# EAGLE board gorrazoptere_v0_93 (EAGLE 4.16)
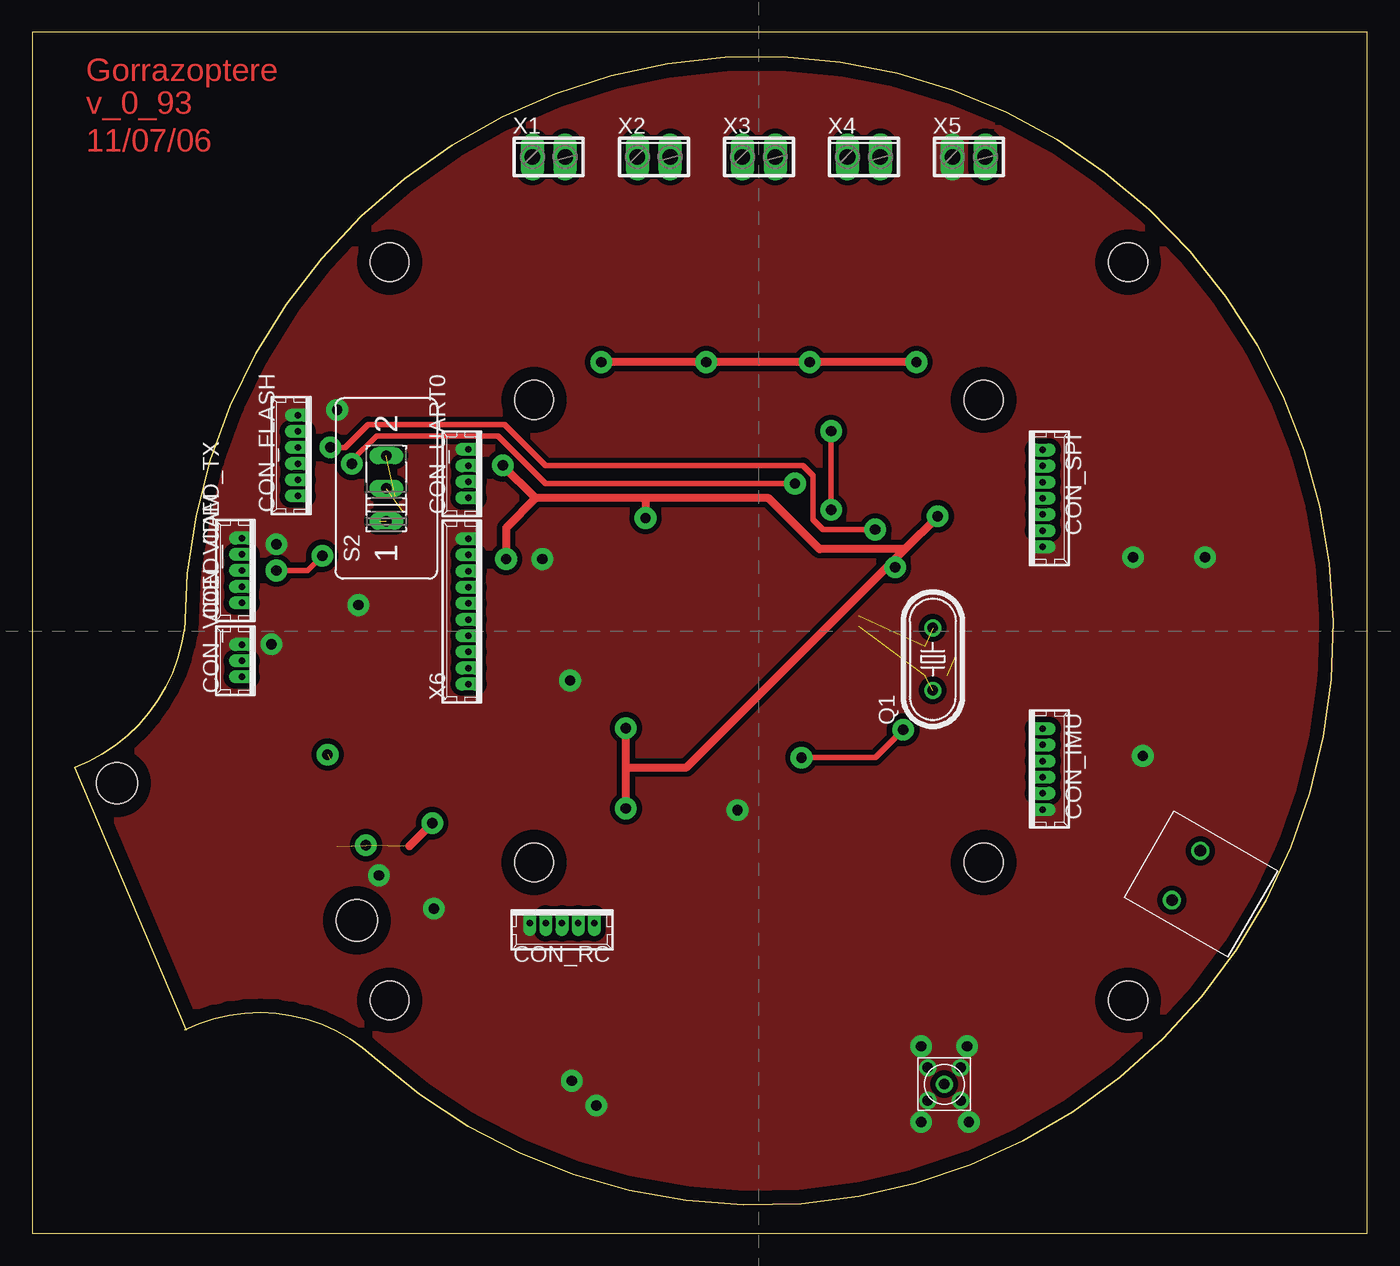
[diagram p0: board, top side]
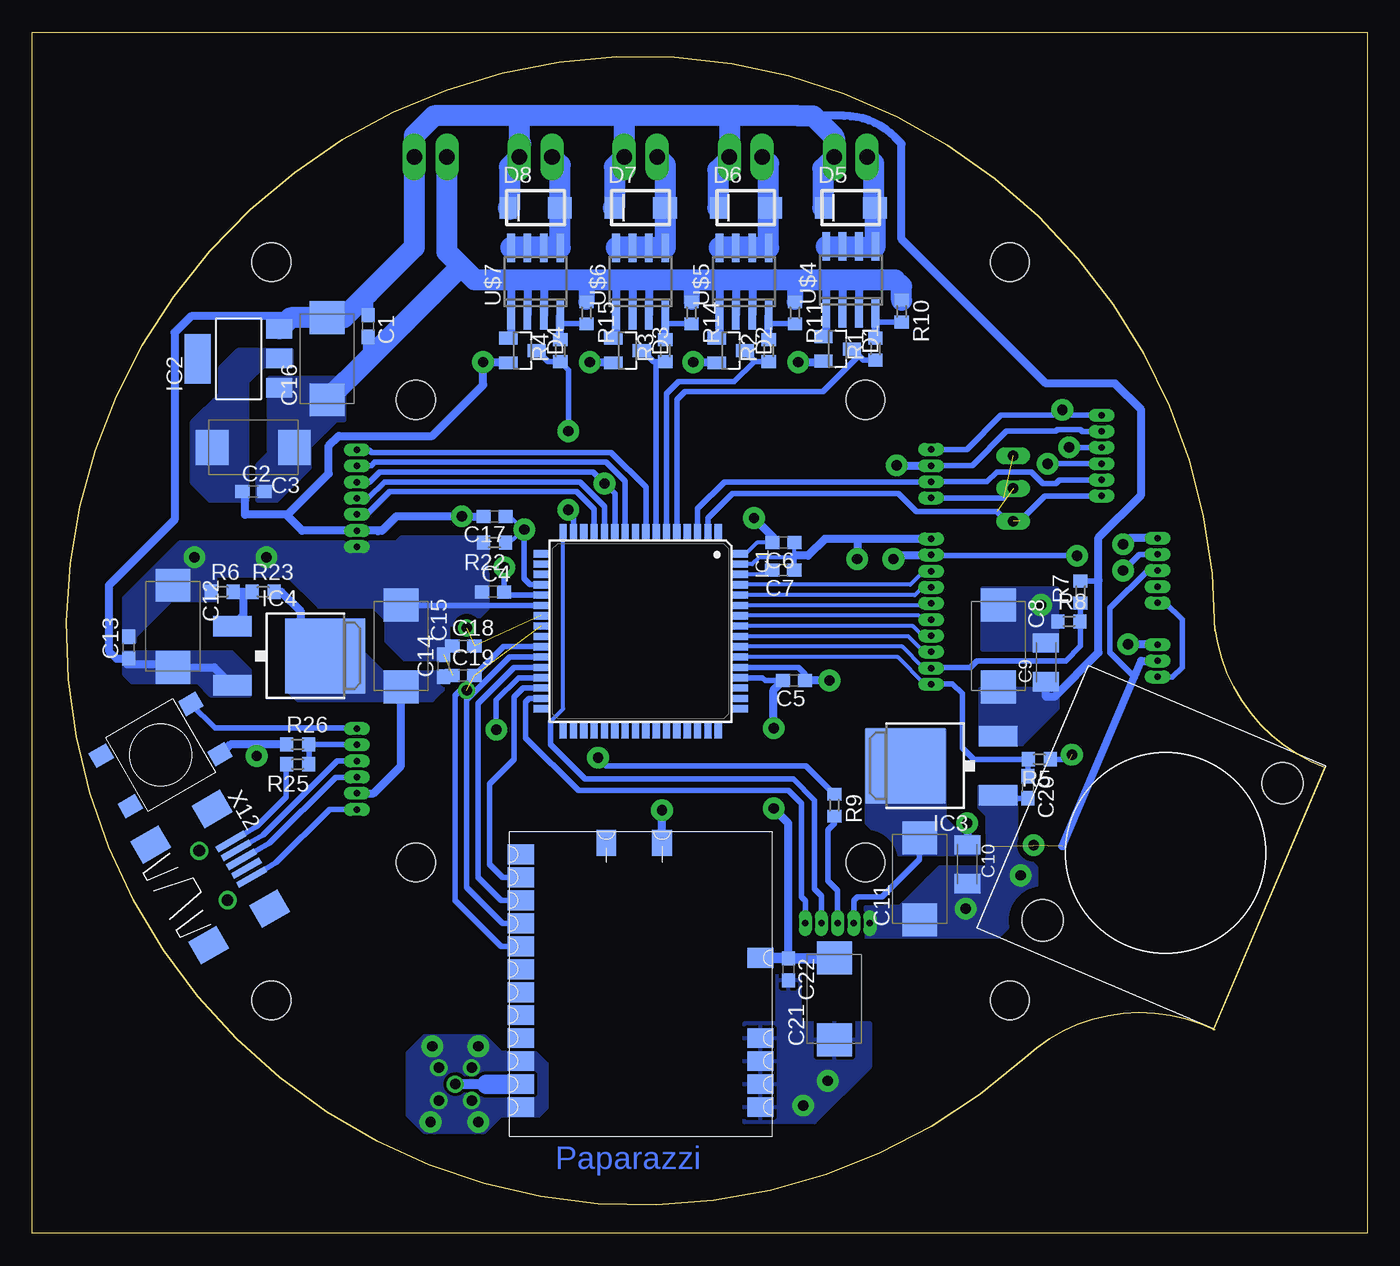
[diagram p1: board, bottom side, seen from below]

Size 103.3 x 92.95 mm. Coordinates in mm from the lower left corner, seen from the top.
Outline: 11.77,15.74 arc-69 26.51,13.58 arc312 11.77,46.6
Outline: 11.77,46.86 arc-62 3.26,36.06 11.9,15.74
Outline: 0,0 103.3,0 103.3,92.95 0,92.95 0,0
Copper layers (1*16): Top 0.035mm / dielectric 1.5mm / Bottom 0.035mm
Design rules "default": minimum track width 10mil, minimum drill 24mil, track to track 8mil, track to pad 8mil, pad to pad 8mil, via to via 8mil, smd to smd 8mil, copper to edge 40mil, drill to drill 8mil, minimum pad ring 10mil, minimum via ring 8mil, stop-mask expansion 4mil, vias tented up to drill 0mil, thermal gap 10mil
Holes 3 mm at 27.65,75.18 84.8,75.18 84.8,18.03 27.65,18.03 38.82,64.51 73.62,64.51 73.62,28.7 38.82,28.7

## Footprints (pad centres in the part's own frame; a part is rotated, then mirrored left to right if it is on the bottom)
C0603 = smd 1.1 x 1: 1 -0.85,0; 2 0.85,0
D/7343-31R = smd 2.55 x 2.7: + 3.175,0; - -3.175,0
C1206K = smd 1.5 x 2: 1 -1.5,0; 2 1.5,0
53047-06 = drill 0.5 pad 0.698 long: 1 3.125,0; 2 1.875,0; 3 0.625,0; 4 -0.625,0; 5 -1.875,0; 6 -3.125,0
53047-05 = drill 0.5 pad 0.698 long: 1 2.5,0; 2 1.25,0; 3 0,0; 4 -1.25,0; 5 -2.5,0
53047-07 = drill 0.5 pad 0.698 long: 1 3.75,0; 2 2.5,0; 3 1.25,0; 4 0,0; 5 -1.25,0; 6 -2.5,0; 7 -3.75,0
53047-04 = drill 0.5 pad 0.698 long: 1 1.875,0; 2 0.625,0; 3 -0.625,0; 4 -1.875,0
53047-03 = drill 0.5 pad 0.698 long: 1 1.25,0; 2 0,0; 3 -1.25,0
SOT23 = smd 1 x 1.4: 1 -0.95,-1.1; 2 0.95,-1.1; 3 0,1.1
DO-214BA = smd 1.85 x 1.68: A 1.87,0 | smd 1.32 x 1.68: C -2.12,0
TQFP64-AEB = smd 1.194 x 0.559: 1 -7.7,6; 2 -7.7,5.2; 3 -7.7,4.4; 4 -7.7,3.6; 5 -7.7,2.8; 6 -7.7,2; 7 -7.7,1.2; 8 -7.7,0.4; 9 -7.7,-0.4; 10 -7.7,-1.2; 11 -7.7,-2; 12 -7.7,-2.8; 13 -7.7,-3.6; 14 -7.7,-4.4; 15 -7.7,-5.2; 16 -7.7,-6; 33 7.7,-6; 34 7.7,-5.2; 35 7.7,-4.4; 36 7.7,-3.6; 37 7.7,-2.8; 38 7.7,-2; 39 7.7,-1.2; 40 7.7,-0.4; 41 7.7,0.4; 42 7.7,1.2; 43 7.7,2; 44 7.7,2.8; 45 7.7,3.6; 46 7.7,4.4; 47 7.7,5.2; 48 7.7,6 | smd 0.559 x 1.194: 17 -6,-7.7; 18 -5.2,-7.7; 19 -4.4,-7.7; 20 -3.6,-7.7; 21 -2.8,-7.7; 22 -2,-7.7; 23 -1.2,-7.7; 24 -0.4,-7.7; 25 0.4,-7.7; 26 1.2,-7.7; 27 2,-7.7; 28 2.8,-7.7; 29 3.6,-7.7; 30 4.4,-7.7; 31 5.2,-7.7; 32 6,-7.7; 49 6,7.7; 50 5.2,7.7; 51 4.4,7.7; 52 3.6,7.7; 53 2.8,7.7; 54 2,7.7; 55 1.2,7.7; 56 0.4,7.7; 57 -0.4,7.7; 58 -1.2,7.7; 59 -2,7.7; 60 -2.8,7.7; 61 -3.6,7.7; 62 -4.4,7.7; 63 -5.2,7.7; 64 -6,7.7
SOT223 = smd 1.499 x 2.007: 1 -2.261,-3.15; 2 0.025,-3.15; 3 2.311,-3.15 | smd 3.81 x 2.007: 4 0,3.15
DPACK = smd 1.6 x 3: 1 -2.28,-4.8; 3 2.28,-4.8 | smd 5.8 x 6.2: 4 0,2.38
HC49U-V = drill 0.813 round: 1 -2.413,0; 2 2.413,0
R0603 = smd 1 x 1.1: 1 -0.85,0; 2 0.85,0
M251 = drill 0.813 long: 1 -2.54,0; 2 0,0; 3 2.54,0
B3S = smd 1.55 x 1.3: P$1 4,-2.25; P$2 -4,-2.25; P$3 4,2.25; P$4 -4,2.25
MAXSONAR_ANA.PAC = drill 0.8 pad 1.676 round: P$3 18.415,6.858; P$6 18.415,14.478; P$7 18.415,17.018 | hole 3.2: 2.54,2.54; 15.494,19.558
WI_232_DTS = smd 2.032 x 1.524: P$1 -10.668,1.651; P$2 -10.668,-2.667 | smd 1.524 x 2.032: P$3 -9.779,-9.271; P$4 -8.001,-9.271; P$5 -6.223,-9.271; P$6 -4.445,-9.271; P$7 -2.667,-9.271; P$8 -0.889,-9.271; P$9 0.889,-9.271; P$10 2.667,-9.271; P$11 4.445,-9.271; P$12 6.223,-9.271; P$13 8.001,-9.271; P$14 9.779,-9.271; P$15 9.779,9.271; P$16 8.001,9.271; P$17 6.223,9.271; P$18 4.445,9.271; P$19 -1.778,9.271
SO08 = smd 0.6 x 2.2: 1 -1.905,-2.6; 2 -0.635,-2.6; 3 0.635,-2.6; 4 1.905,-2.6; 5 1.905,2.6; 6 0.635,2.6; 7 -0.635,2.6; 8 -1.905,2.6
CON_MMCX = drill 0.813 round: P$1 1.27,1.27; P$2 -1.27,1.27; P$3 -1.27,-1.27; P$4 1.27,-1.27; P$5 0,0
2POL254 = drill 1.2 long: 1 -1.27,0; 2 1.27,0
53047-10 = drill 0.5 pad 0.698 long: 1 5.625,0; 2 4.375,0; 3 3.125,0; 4 1.875,0; 5 0.625,0; 6 -0.625,0; 7 -1.875,0; 8 -3.125,0; 9 -4.375,0; 10 -5.625,0
USB-MB-S = smd 2.5 x 0.5: D+ 2.5,0; D- 2.5,0.8; GND 2.5,-1.6; ID 2.5,-0.8; VBUS 2.5,1.6 | smd 2.5 x 2: P$1 -3,-4.5; P$2 -3,4.5; P$3 2.5,-4.4; P$4 2.5,4.5 | drill 0.9 round: P$5 0,2.2; P$6 0,-2.2

## Placement (x,y rotation side)
C1  100nF  [C0603]  77.31,70.23 270 bottom
C2  100nF  [C0603]  86.2,57.4 0 bottom
C3  22uF  [D/7343-31R]  86.2,60.83 180 bottom
C4  [C0603]  67.65,49.65 0 bottom
C5  [C0603]  44.36,42.79 180 bottom
C6  [C0603]  45.17,53.46 180 bottom
C7  100nF  [C0603]  45.19,51.34 180 bottom
C8  22uF  [D/7343-31R]  28.54,45.46 270 bottom
C9  100nF  [C1206K]  24.85,44.19 90 bottom
C10  100nF  [C1206K]  30.95,28.57 270 bottom
C11  22uF  [D/7343-31R]  34.63,27.43 90 bottom
C12  22uF  [D/7343-31R]  92.42,46.98 270 bottom
C13  100nF  [C0603]  95.85,45.33 90 bottom
C14  100nF  [C0603]  71.46,43.94 90 bottom
C15  22uF  [D/7343-31R]  74.77,45.46 270 bottom
C16  22uF  [D/7343-31R]  80.48,67.69 90 bottom
C17  [C0603]  67.53,55.49 180 bottom
C18  22pF  [C0603]  69.94,45.46 0 bottom
C19  22pF  [C0603]  69.94,43.17 0 bottom
C20  100nF  [C0603]  26.25,34.54 270 bottom
C21  22uF  [D/7343-31R]  41.24,18.16 90 bottom
C22  100nF  [C0603]  44.79,20.44 270 bottom
CON_FLASH  [53047-06]  20.54,60.19 90 top
CON_IMU  [53047-06]  78.19,35.94 270 top
CON_RC  [53047-05]  40.98,24 180 top
CON_SPI  [53047-07]  78.19,56.89 270 top
CON_UART0  [53047-04]  33.74,58.8 90 top
CON_VIDEO_CAM  [53047-03]  16.22,44.32 90 top
CON_VIDEO_TX  [53047-05]  16.22,51.3 90 top
D1  BAV199  [SOT23]  40.98,68.45 270 bottom
D2  BAV199  [SOT23]  49.24,68.32 270 bottom
D3  BAV199  [SOT23]  57.24,68.32 270 bottom
D4  BAV199  [SOT23]  65.37,68.32 270 bottom
D5  [DO-214BA]  39.97,79.37 0 bottom
D6  [DO-214BA]  48.09,79.37 0 bottom
D7  [DO-214BA]  56.22,79.37 0 bottom
D8  [DO-214BA]  64.35,79.37 0 bottom
IC1  MEGA128-A  [TQFP64-AEB]  56.22,46.6 270 bottom
IC2  REG1117  [SOT223]  87.34,67.69 90 bottom
IC3  LM317MABDT  [DPACK]  33.36,36.19 90 bottom
IC4  LM317MABDT  [DPACK]  83.02,44.7 270 bottom
Q1  [HC49U-V]  69.69,44.45 90 top
R1  100R  [R0603]  38.06,68.45 90 bottom
R2  100R  [R0603]  46.32,68.32 90 bottom
R3  100R  [R0603]  54.32,68.32 90 bottom
R4  100R  [R0603]  62.45,68.32 90 bottom
R5  1K  [R0603]  25.36,36.7 180 bottom
R6  10K  [R0603]  88.61,49.65 0 bottom
R7  10K  [R0603]  22.19,49.65 90 bottom
R8  10K  [R0603]  23.08,47.37 0 bottom
R9  100R  [R0603]  41.24,33.14 270 bottom
R10  10K  [R0603]  36.03,71.37 270 bottom
R11  10K  [R0603]  44.29,71.24 270 bottom
R14  10K  [R0603]  52.29,71.24 270 bottom
R15  10K  [R0603]  60.41,71.24 270 bottom
R22  1K  [R0603]  67.53,53.46 180 bottom
R23  10K  [R0603]  85.43,49.65 0 bottom
R25  3.3K  [R0603]  82.77,36.32 180 bottom
R26  4.7K  [R0603]  82.77,37.84 0 bottom
S2  [M251]  27.39,57.65 90 top
U$1  B3S  [B3S]  93.37,37.03 210 bottom
U$2  MAXSONAR_ANA  [MAXSONAR_ANA.PAC]  3.22,36.18 157 bottom
U$3  WI232  [WI_232_DTS]  56.22,19.55 270 bottom
U$4  IRF7809  [SO08]  39.97,73.78 0 bottom
U$5  IRF7809  [SO08]  48.22,73.66 0 bottom
U$6  IRF7809  [SO08]  56.22,73.66 0 bottom
U$7  IRF7809  [SO08]  64.35,73.66 0 bottom
U$8  CON_MMCX  [CON_MMCX]  70.57,11.55 0 top
X1  [2POL254]  39.97,83.31 0 top
X2  [2POL254]  48.09,83.31 0 top
X3  [2POL254]  56.22,83.31 0 top
X4  [2POL254]  64.35,83.31 0 top
X5  [2POL254]  72.48,83.31 0 top
X6  [53047-10]  33.74,48.13 90 top
X12  USB-MB-S  [USB-MB-S]  89.29,27.7 30 bottom

## Library data of the parts
C1-C22 R1-R11 R14 R15 R22 R23 R25 R26 = rcl
CON_FLASH CON_IMU CON_RC CON_SPI CON_UART0 CON_VIDEO_CAM CON_VIDEO_TX X6 = con-molex
D1-D8 = diode
IC1 = atmel
IC2 = burr-brown
IC3 IC4 = v-reg
Q1 = crystal
S2 = switch
U$1-U$8 = paparazzi
X1-X5 = con-phoenix-254
X12 = con-usb

## Nets
4017_RESET: CON_RC.5 IC1.31
+3V3: C2.1 C3.+ C4.2 C5.2 C6.2 C17.2 C21.+ C22.1 CON_FLASH.2 CON_SPI.2 CON_UART0.2 CON_VIDEO_TX.2 D1.2 D2.2 D3.2 D4.2 IC1.21 IC1.52 IC1.64 IC2.2 U$3.P$19 X6.2
+5V: C10.1 C11.+ CON_RC.2 CON_VIDEO_CAM.2 CON_VIDEO_TX.3 IC3.4 U$2.P$6
+6V5: C14.1 C15.+ CON_IMU.2 IC4.4 R23.2
ADC0: IC1.61 X6.3
ADC1: IC1.60 X6.4
ADC2: IC1.59 X6.5
ADC3: IC1.58 X6.6
ADC4: IC1.57 X6.7
ADC5: IC1.56 X6.8
ADC6: IC1.55 R7.1 R8.2 X6.9
ADC7: C20.1 IC1.54 R5.2 X6.10
AUDIO: CON_VIDEO_TX.4
CMD: IC1.30 U$3.P$4
CON_FLASH_PDI: CON_FLASH.6 S2.1
CTS: IC1.26 U$3.P$7
GND: C1.2 C2.2 C3.- C4.1 C5.1 C6.1 C7.1 C8.- C9.2 C10.2 C11.- C12.- C13.2 C14.2 C15.- C16.- C18.1 C19.1 C20.2 C21.- C22.2 CON_FLASH.1 CON_IMU.1 CON_RC.1 CON_SPI.1 CON_UART0.1 CON_VIDEO_CAM.1 CON_VIDEO_TX.1 D1.1 D2.1 D3.1 D4.1 IC1.22 IC1.53 IC1.63 IC2.1 IC3.1 R6.1 R8.1 R10.1 R11.1 R14.1 R15.1 R22.2 R26.1 U$1.P$4 U$2.P$7 U$3.P$1 U$3.P$12 U$3.P$14 U$3.P$15 U$3.P$16 U$3.P$17 U$3.P$18 U$4.1 U$4.2 U$4.3 U$5.1 U$5.2 U$5.3 U$6.1 U$6.2 U$6.3 U$7.1 U$7.2 U$7.3 U$8.P$1 U$8.P$2 U$8.P$3 U$8.P$4 X5.1 X6.1 X12.GND
MISO: CON_SPI.3 IC1.13
MOSI: CON_SPI.4 IC1.12
N$1: C18.2 IC1.23 Q1.2
N$2: C19.2 IC1.24 Q1.1
N$6: U$3.P$13 U$8.P$5
N$7: CON_RC.3 R9.2
N$8: CON_IMU.6 U$1.P$2
N$9: R1.2 R10.2 U$4.4
N$13: D5.A U$4.5 U$4.6 U$4.7 U$4.8 X1.1
N$14: D6.A U$5.5 U$5.6 U$5.7 U$5.8 X2.1
N$15: D7.A U$6.5 U$6.6 U$6.7 U$6.8 X3.1
N$16: D8.A U$7.5 U$7.6 U$7.7 U$7.8 X4.1
N$19: R2.2 R11.2 U$5.4
N$20: R3.2 R14.2 U$6.4
N$21: R4.2 R15.2 U$7.4
N$23: C7.2 IC1.62
N$24: R25.2 X12.VBUS
N$25: CON_UART0.4 S2.3
N$26: IC4.1 R6.2 R23.1
N$36: R5.1 U$2.P$3
PDI: IC1.2 S2.2
PDO: CON_FLASH.5 CON_UART0.3 IC1.3
PPM_IN: IC1.29 R9.1
PPM_OUT1: CON_RC.4 IC1.16
PWM0: D1.3 IC1.5 R1.1
PWM1: D2.3 IC1.6 R2.1
PWM2: D3.3 IC1.7 R3.1
PWM3: D4.3 IC1.15 R4.1
RESET: C17.1 CON_FLASH.3 IC1.20 R22.1
RXD1: IC1.27 U$3.P$6
SCK: CON_FLASH.4 CON_SPI.5 IC1.11
SINT: CON_SPI.7 IC1.8
SS: CON_SPI.6 IC1.10
TXD1: IC1.28 U$3.P$5
USB+: CON_IMU.3 X12.D+
USB-: CON_IMU.4 X12.D-
USB_VBUS: CON_IMU.5 R25.1 R26.2
VBAT: C1.1 C8.+ C9.1 C12.+ C13.1 C16.+ D5.C D6.C D7.C D8.C IC2.3 IC3.3 IC4.3 R7.2 X1.2 X2.2 X3.2 X4.2 X5.2
VIDEO: CON_VIDEO_CAM.3 CON_VIDEO_TX.5

## Tracks (layer width: path | path; a pad name or v marks a point on that pad's centre or on a via)
4017_RESET
  Bottom 0.406: IC1.31 64.85,41.4 65.11,41.14 65.11,38.35 61.05,34.28 44.79,34.28 43.78,33.27 43.78,26.03 43.48,25.74 CON_RC.5
+3V3  (via drill 0.8 pad 1.68)
  Top 0.406: 66.38,51.94 66.45,51.88 v66.76,51.56 | v18.88,51.3 21.3,51.3 v22.44,52.45
  Top 0.61: v44.03,67.43 v52.16,67.43 v60.16,67.43 v68.42,67.43 | 38.95,56.89 v36.41,59.43 | 47.46,56.89 38.95,56.89 | 47.46,56.89 56.98,56.89 60.92,52.95 67.53,52.95 | 67.53,52.95 v70.07,55.49 | 47.46,56.89 v47.46,55.37 | v36.66,52.19 36.66,54.6 38.95,56.89 | v45.94,32.89 45.94,36.06 | 45.94,36.06 v45.94,39.11 | 45.94,36.06 50.64,36.06 66.45,51.88 67.53,52.95
  Bottom 0.305: IC1.64 48.06,52.6 47.21,53.46 C6.2 45.94,53.46 | 68.54,55.49 C17.2
  Bottom 0.406: CON_UART0.2 30.57,59.43 27.9,62.1 24.09,62.1 23.97,62.22 22.19,62.22 22.03,62.07 CON_FLASH.2 | IC1.52 46.78,43 46.57,42.79 C5.2 45.17,42.79 | IC1.21 66.39,49.4 66.64,49.65 C4.2 66.8,51.52 v66.76,51.56 | CON_VIDEO_TX.2 17.63,52.55 v18.88,51.3 | X6.2 33.74,52.45 v22.44,52.45
  Bottom 0.61: D1.2 42.08,67.48 42.13,67.43 v44.03,67.43 | D2.2 50.34,67.39 50.38,67.43 v52.16,67.43 | D3.2 58.34,67.39 58.38,67.43 v60.16,67.43 | D4.2 66.58,67.37 66.64,67.43 v68.42,67.43 68.42,65.65 72.35,61.72 79.59,61.72 80.35,60.95 80.35,58.8 83.53,55.62 83.66,55.62 | X6.2 36.59,52.5 v36.66,52.19 | 68.42,55.62 68.38,55.58 C17.2 | 83.66,55.62 86.83,55.62 86.83,57.27 86.92,57.27 C2.1 | 83.66,55.62 82.42,54.39 CON_SPI.2 76.54,54.39 | 76.54,54.39 76.25,54.39 75.15,55.49 v70.07,55.49 68.54,55.49 | CON_UART0.2 36.4,59.42 v36.41,59.43 | 45.94,53.84 45.94,53.46 | 45.94,53.84 46.02,53.75 C6.2 | v47.46,55.37 45.94,53.84 | 44.79,21.33 44.79,31.75 v45.94,32.89 | 76.54,54.39 76.54,54.35 | 45.94,38.98 v45.94,39.11 45.94,42.07 C5.2
  Bottom 0.813: U$3.P$19 44.79,21.33 C22.1 41.24,21.29 | C21.+ 41.24,21.29 | 41.24,21.29 41.24,21.2
  Bottom 1.626: C3.+ 89.5,60.95
  pour Bottom (no thermals): 83.27,68.32 87.34,68.32 88.73,66.92 88.73,64.89 90.89,62.73 90.89,58.16 89.5,56.76 86.7,56.76 86.7,65.91 85.43,67.18 83.27,67.18
+5V  (via drill 0.8 pad 1.68)  (2 unrouted)
  Top 0.61: 29.16,29.96 v30.95,31.75
  Bottom 0.406: C11.+ 34.63,28.95 37.55,26.03 39.46,26.03 39.73,25.76 CON_RC.2 | 17.87,43.3 17.89,43.32 17.91,43.32 | 18.01,43.06 18,43.05 | 18.02,43.06 18.01,43.06 | 18.01,43.06 19.9,44.95 19.9,48.38 16.98,51.3 CON_VIDEO_TX.3
  Bottom 0.61: v30.95,31.75 C10.1 | 23.59,29.96 23.58,29.97 18.02,43.06 17.91,43.32 17.49,44.32 CON_VIDEO_CAM.2
  pour Bottom (isolate 0.406, no thermals): 32.73,38.98 32.73,32.13 31.33,30.73 30.19,30.73 30.19,29.33 36.28,29.33 38.7,31.75 38.7,38.98
+6V5
  Bottom 0.61: CON_IMU.2 76.89,34.06 74.77,36.19 C15.+ | R23.2 84.04,49.65 82.51,48.13 82.51,46.98
  pour Bottom (isolate 0.406, no thermals): 71.08,43.43 76.16,43.43 77.69,44.95 77.69,47.37 83.53,47.37 83.53,42.03 82.77,41.27 72.35,41.27 71.08,42.54
ADC0
  Bottom 0.305: IC1.61 35.35,50.2 34.3,51.25 X6.3
ADC1
  Bottom 0.305: X6.4 34.41,50 35.01,49.4 IC1.60
ADC2
  Bottom 0.305: X6.5 33.9,48.6 IC1.59
ADC3
  Bottom 0.305: IC1.58 34.69,47.8 34.38,47.49 X6.6
ADC4
  Bottom 0.305: IC1.57 35.16,47 34.38,46.22 33.74,46.22 X6.7
ADC5
  Bottom 0.305: IC1.56 35.5,46.2 34.25,44.95 33.74,44.95 X6.8
ADC6
  Bottom 0.305: IC1.55 35.97,45.4 34.38,43.81 33.74,43.81 X6.9
  Bottom 0.406: 22.31,47.37 R8.2 22.19,47.37 | 33.74,43.81 30.7,43.81 30.19,44.32 23.33,44.32 22.19,45.46 22.19,47.37 | 22.19,47.37 R7.1
ADC7
  Bottom 0.305: IC1.54 36.32,44.6 34.25,42.54 33.74,42.54 X6.10
  Bottom 0.406: C20.1 26.25,36.7 R5.2 30.44,36.7 31.33,37.59 31.33,41.78 32.09,42.54 33.74,42.54
CMD
  Bottom 0.406: U$3.P$4 66.89,27.55 67.91,28.57 67.91,34.79 66,36.7 66,41.52 65.32,42.2 IC1.30
CON_FLASH_PDI  (1 unrouted)
  Bottom 0.406: CON_FLASH.6 24.93,57.07 26.89,55.11
CTS
  Bottom 0.406: IC1.26 66.82,45.4 70.57,41.65 70.57,25.78 67.02,22.22 U$3.P$7
GND  (via drill 0.8 pad 1.68)  (1 unrouted)
  Bottom 0.305: C6.1 44.41,53.46 44.34,53.39 44.34,52.45 44.34,52.32 | 44.34,52.32 C7.1 | IC1.63 47.59,51.8 47.08,52.32 44.34,52.32 | R22.2 68.42,53.46 68.42,53.33
  Bottom 0.406: CON_FLASH.1 28.33,63.32 30.98,60.67 CON_UART0.1 | IC1.53 44.02,43.8 43.52,43.3 43.52,42.79 | X12.GND 84.42,28.7 80.3,32.81 CON_IMU.1 | IC3.1 28.54,33.88 28.54,33.65 26.29,33.65 C20.2 | IC1.22 73.37,48.6 73.37,48.64
  Bottom 0.61: 63.72,70.99 U$7.3 63.72,73.78 | D1.1 arc-90 41.87,69.61 U$4.1 41.87,73.78 | 50.13,71.12 U$5.1 | D2.1 arc-90 50.13,69.48 50.13,71.12 | D3.1 arc-90 58.13,69.48 U$6.1 58.13,73.78 | D4.1 arc-90 66.26,69.48 U$7.1 66.26,73.78 | 39.33,73.78 U$4.3 | 40.6,73.78 U$4.2 | 47.59,73.78 U$5.3 | 48.86,73.78 U$5.2 | 50.13,73.78 50.13,71.12 | 55.59,73.78 U$6.3 | 56.86,73.78 U$6.2 | 64.99,73.78 U$7.2 | 36.09,73.34 36.03,73.4 | X6.1 39.46,53.75 | 39.46,53.75 41.96,53.75 43.27,52.45 44.34,52.45 | 39.46,53.75 v39.46,52.19 | 68.42,53.33 68.38,53.37 R22.2 | 88.73,37.08 | 88.73,37.08 U$1.P$4 | R26.1 85.94,37.84 | 85.94,37.84 87.97,37.84 88.73,37.08 | 54.57,32.89 v54.57,32.76 U$3.P$1 | C5.1 43.52,42.79 v41.62,42.79 | 85.94,37.84 v85.94,36.95 | CON_VIDEO_CAM.1 18.52,45.57 | CON_VIDEO_TX.1 18.42,53.8 v18.88,53.33
  Bottom 0.813: 77.37,67.62 77.31,67.56 C1.2
  Bottom 1.219: 44.29,73.78 R11.1 | 52.29,73.78 R14.1 | 60.41,73.78 R15.1
  Bottom 1.626: R10.1 36.03,73.27 36.09,73.34 36.54,73.78 39.33,73.78 40.6,73.78 41.87,73.78 44.29,73.78 47.59,73.78 48.86,73.78 50.13,73.78 52.29,73.78 55.59,73.78 56.86,73.78 58.13,73.78 60.41,73.78 63.72,73.78 64.99,73.78 66.26,73.78 69.05,73.78 70.13,74.86 | X5.1 71.21,75.94 70.13,74.86 | 70.13,74.86 77.37,67.62 C16.-
  other vias: 41.75,11.81 43.65,9.9 68.8,14.47 72.35,14.47 68.8,8.63 72.48,8.63 85.18,52.32 90.77,52.32 25.23,48.64 31.08,25.14 18.5,45.59 23.58,63.75
  pour Bottom: 38.44,16.25 43.9,16.25 43.9,19.93 45.68,19.93 45.68,16.25 48.22,16.25 48.22,8.63 42.76,8.63 38.44,12.95
  pour Bottom (isolate 0.254, no thermals): 64.35,13.96 67.02,13.96 68.29,15.23 72.99,15.23 74.26,13.96 74.26,9.14 72.99,7.87 68.29,7.87 67.02,9.14 64.1,9.14 63.46,9.77 63.46,13.08
  pour Bottom (no thermals): 84.92,66.16 79.21,66.16 79.21,62.99 79.84,62.99 81.88,60.95 81.88,59.3 84.42,56.76 85.81,56.76 85.81,59.43 84.92,60.32
  pour Top (isolate 0.406, no thermals): 1.1,92.07 102.32,92.07 102.32,0.88 1.1,0.88
  pour Bottom (isolate 0.406, no thermals): 71.08,44.45 71.08,47.11 69.3,47.11 68.03,48.38 68.03,53.84 74.77,53.84 75.15,53.46 91.91,53.46 96.23,49.14 96.23,45.84 95.34,45.84 95.34,46.22 92.55,49.02 89.12,49.02 89.12,50.92 83.53,50.92 81.11,48.51 76.92,48.51 75.91,47.49 75.91,45.84 74.51,44.45
  pour Bottom (isolate 0.406, no thermals): 23.97,45.21 23.97,49.91 29.81,49.91 29.81,45.21
  pour Bottom (isolate 0.406, no thermals): 25.62,28.32 27.14,29.84 27.14,34.54 30.06,34.54 30.06,33.01 29.43,32.38 29.43,28.32 33.11,28.32 36.16,25.27 38.82,25.27 38.82,22.98 28.54,22.98 25.62,25.9
MISO
  Bottom 0.406: IC1.13 59.82,56.05 61.18,57.4 75.65,57.4 77.43,55.62 78.19,55.62 CON_SPI.3
MOSI
  Bottom 0.406: IC1.12 59.02,56.26 60.92,58.16 76.03,58.16 77.31,56.89 CON_SPI.4
N$1  (2 unrouted)
N$2  (2 unrouted)
N$6
  Bottom 0.762: 68.16,11.55 U$8.P$5
  Bottom 1.524: U$3.P$13 68.16,11.55
N$7
  Bottom 0.406: CON_RC.3 40.98,26.54 41.75,27.3 41.75,31.24 41.24,31.75 R9.2
N$8
  Bottom 0.406: CON_IMU.6 78.19,39.11 89.17,39.11 U$1.P$2
N$9
  Bottom 0.406: R10.2 38.02,70.52 38.06,70.48
  Bottom 0.61: R1.2 38.06,70.48 U$4.4
N$13
  Bottom 1.626: U$4.6 39.33,76.32 | U$4.6 39.39,76.32 40.54,76.32 U$4.7 40.66,76.32 41.81,76.32 U$4.8 | X1.1 38.19,82.8 38.19,79.37 D5.A 38.19,79.28 38.06,79.15 U$4.5 38.12,76.32 39.27,76.32 U$4.6
N$14
  Bottom 1.626: X2.1 46.32,82.8 46.32,79.37 D6.A 46.32,79.28 U$5.5 46.38,76.32 47.59,76.32 U$5.6 47.65,76.32 48.86,76.32 U$5.7 48.92,76.32 50.13,76.32 U$5.8
N$15
  Bottom 1.626: X3.1 54.32,82.67 54.32,79.41 D7.A 54.32,79.34 U$6.5 54.39,76.32 55.59,76.32 U$6.6 55.66,76.32 56.86,76.32 U$6.7 56.93,76.32 58.13,76.32 U$6.8
N$16
  Bottom 1.626: X4.1 62.45,82.67 62.45,79.41 D8.A 62.45,79.34 U$7.5 62.51,76.32 63.78,76.32 | 63.78,76.32 63.84,76.32 | 65.05,76.32 65.11,76.32 | 63.78,76.32 U$7.6 | 63.78,76.32 65.05,76.32 | U$7.8 66.26,76.32 65.05,76.32 | 65.05,76.32 U$7.7
N$19
  Bottom 0.406: R11.2 46.28,70.39 46.32,70.35
  Bottom 0.61: R2.2 46.32,70.35 U$5.4
N$20
  Bottom 0.406: R14.2 54.28,70.39 54.32,70.35
  Bottom 0.61: R3.2 54.32,70.35 U$6.4
N$21
  Bottom 0.406: R15.2 62.41,70.39 62.45,70.35
  Bottom 0.61: R4.2 62.45,70.35 U$7.4
N$23
  Bottom 0.305: C7.2 46.04,51.33 46.36,51 IC1.62
N$24
  Bottom 0.406: X12.VBUS 85.94,31.49 83.66,33.78 83.66,36.32 R25.2
N$25  (1 unrouted)
  Bottom 0.406: 28.13,56.92 CON_UART0.4
N$26
  Bottom 0.61: 86.96,49.65 R23.1 | 86.96,49.65 R6.2 | IC4.1 86.96,47.84 86.96,49.65
N$30  (via drill 0.6 pad 1.68)
  other vias: 84.8,75.18
N$31  (via drill 0.6 pad 1.68)
  other vias: 73.62,64.51
N$34  (via drill 0.6 pad 1.68)
  other vias: 38.82,64.51
N$35  (via drill 0.6 pad 1.68)
  other vias: 27.65,75.18
N$36  (1 unrouted)
  Bottom 0.406: R5.1 23.06,36.7
N$37  (via drill 0.6 pad 1.68)
  other vias: 38.82,28.7
N$38  (via drill 0.6 pad 1.68)
  other vias: 27.65,18.03
N$39  (via drill 0.6 pad 1.68)
  other vias: 25.11,24.12
N$40  (via drill 0.6 pad 1.68)
  other vias: 6.57,34.79
N$41  (via drill 0.6 pad 1.68)
  other vias: 73.62,28.7
N$42  (via drill 0.6 pad 1.68)
  other vias: 84.8,18.03
PDI  (1 unrouted)
  Bottom 0.406: IC1.2 51.02,55.36 49.11,57.27 36.28,57.27 34.89,55.88 28.66,55.88 27.9,55.11
PDO
  Bottom 0.406: IC1.3 51.82,56.08 49.75,58.16 33.74,58.16 CON_UART0.3 29.42,58.17 28.66,58.92 26,58.92 25.11,58.03 24.09,58.03 23.81,58.32 CON_FLASH.5
PPM_IN  (via drill 0.8 pad 1.68)
  Top 0.406: v59.52,36.82 65.24,36.82 v67.4,38.98
  Bottom 0.406: v59.52,36.82 58.89,36.19 43.44,36.19 R9.1 | IC1.29 65.67,43 67.4,41.27 v67.4,38.98
PPM_OUT1
  Bottom 0.305: IC1.16 62.22,40.6 63.21,39.62
  Bottom 0.406: 63.21,39.62 63.21,37.84 60.54,35.17 44.41,35.17 42.76,33.52 42.76,26.66 42.23,26.14 CON_RC.4
PWM0
  Bottom 0.305: R1.1 38.06,67.56
  Bottom 0.406: D1.3 39.84,68.45 39.2,67.81 | R1.1 38.99,67.6 39.2,67.81 | IC1.5 53.42,62.99 53.43,62.99 53.43,64.51 52.79,65.15 42.13,65.15 39.46,67.81 39.2,67.81
PWM1
  Bottom 0.305: 48.22,68.32 D2.3
  Bottom 0.406: 47.37,67.47 R2.1 | 47.37,67.47 48.22,68.32 | 47.37,67.47 47.42,67.47 48.98,65.91 53.3,65.91 54.22,64.99 IC1.6
PWM2
  Bottom 0.305: R3.1 54.32,67.43 | 56.1,68.32 D3.3 | 54.95,67.43 54.95,67.47
  Bottom 0.406: R3.1 54.95,67.47 55.25,67.47 56.1,68.32 | IC1.7 55.02,67.36 54.95,67.43
PWM3  (via drill 0.8 pad 1.68)
  Top 0.406: v61.81,56 v61.81,62.1
  Bottom 0.305: R4.1 62.45,67.56 | 64.22,68.32 D4.3 64.35,68.32
  Bottom 0.406: 64.22,68.32 63.37,67.47 R4.1 62.45,67.43 61.81,66.8 v61.81,62.1 | IC1.15 61.42,55.61 v61.81,56
RESET  (via drill 0.8 pad 1.68)
  Top 0.406: v65.24,54.48 61.18,54.48 60.41,55.24 60.41,58.67 59.65,59.43 39.71,59.43 36.54,62.61 26,62.61 24.22,60.83 v23.08,60.83
  Bottom 0.305: C17.1 66.38,55.49 v65.24,54.48 66.38,53.46 R22.1
  Bottom 0.406: CON_FLASH.3 v23.07,60.82 v23.08,60.83 | IC1.20 64.78,50.2 65.24,50.67 v65.24,54.48
RXD1
  Bottom 0.406: IC1.27 66.35,44.6 69.69,41.27 69.69,26.79 66.89,24 U$3.P$6
SCK  (via drill 0.8 pad 1.68)
  Top 0.406: v24.73,59.56 24.73,59.81 26.63,61.72 36.03,61.72 39.71,58.03 v59.02,58.03
  Bottom 0.406: IC1.11 58.22,57.24 v59.02,58.03 59.91,58.92 76.42,58.92 77.2,58.14 CON_SPI.5 | CON_FLASH.4 v24.72,59.57 v24.73,59.56
SINT
  Bottom 0.406: IC1.8 55.82,57.76 58.51,60.45 77.05,60.45 77.25,60.64 CON_SPI.7
SS
  Bottom 0.406: IC1.10 57.42,58.22 58.89,59.68 76.8,59.68 77.05,59.43 78.19,59.43 CON_SPI.6
TXD1
  Bottom 0.406: U$3.P$5 67.02,25.78 68.8,27.55 68.8,41.02 66,43.81 63.97,43.81 63.96,43.8 IC1.28
USB+
  Bottom 0.406: X12.D+ 84.92,30.22 79.84,35.3 78.2,35.3 CON_IMU.3
USB-
  Bottom 0.406: X12.D- 85.43,30.86 79.72,36.57 CON_IMU.4
USB_VBUS
  Bottom 0.406: R26.2 81.88,37.84 81.88,36.36 R25.1 | R26.2 82,37.84 | CON_IMU.5 78.22,37.84 R26.2
VBAT
  Bottom 0.406: R7.2 20.83,50.5 20.79,50.54
  Bottom 0.61: C12.+ 92.55,43.81 | IC4.3 89.21,43.81 C12.+ | 95.94,44.06 95.97,44.06 | 95.94,44.06 C13.1 96.78,44.48 97.37,45.08 97.37,50.16 92.29,55.24 92.29,69.72 91.02,70.99 83.15,70.99 83.15,70.86 | C12.+ 92.67,44.06 95.94,44.06 | C1.1 77.31,72.89 76.67,73.53 | 44.03,86.48 40.48,86.48 arc46 36.54,84.83 36.03,84.32 36.03,76.96 24.85,65.78 19.52,65.78 17.49,63.75 17.49,57.14 20.79,53.84 20.79,50.54 20.79,44.95 24.22,41.52 24.85,41.52 C9.1
  Bottom 0.813: 77.31,72.77 C1.1
  Bottom 1.626: 49.37,86.48 X2.2 49.37,83.18 50.25,82.29 50.25,79.37 D6.C | 57.49,86.48 X3.2 58.26,82.55 58.26,79.37 D7.C | 49.37,86.48 57.49,86.48 | 65.62,84.32 65.62,86.48 65.49,86.48 | 65.62,84.32 X4.2 66.38,82.55 66.38,79.28 | 57.49,86.48 65.49,86.48 | 65.62,84.32 65.49,84.32 | D5.C 42.13,79.37 42.13,82.42 X1.2 41.24,84.83 42.89,86.48 44.03,86.48 49.37,86.48 | 66.38,79.28 66.38,79.24 | 66.38,79.28 D8.C | 65.49,86.48 72.23,86.48 73.75,84.96 X5.2 73.75,76.32 77.31,72.77 79.21,70.86 C16.+ | C16.+ 80.61,70.86 | IC2.3 83.33,70.86 83.15,70.86 C16.+
  pour Bottom (isolate 0.406, no thermals): 86.45,41.65 86.45,43.56 87.85,44.95 96.23,44.95 96.23,43.3 95.59,42.67 90.51,42.67 89.5,41.65
  pour Bottom (isolate 0.406, no thermals): 29.93,42.16 23.97,42.16 23.97,40.63 26.76,37.84 29.93,37.84
VIDEO
  Bottom 0.406: 16.2,43.05 15.08,43.05 14.31,43.81 14.31,47.49 15.62,48.8 CON_VIDEO_TX.5
  Bottom 0.61: 16.2,43.05 CON_VIDEO_CAM.3

## Text on the board
Top: Gorrazoptere | v_0_93 | 11/07/06
Bottom: Paparazzi